# Altium PCB PCB1.PcbDoc (part 2 of 4)
Units mm, origin at the board's own origin, x right, y up, seen from the top; angles counter-clockwise.
Board outline 100.03 x 99.98 mm, 4 copper layers (Top Layer, Layer 2, Layer 3, Bottom Layer), stack 0.603 mm thick; 139 components, 135 nets, 1369 pads, 401 vias.
Unrouted connection lines stored in the file: 1.
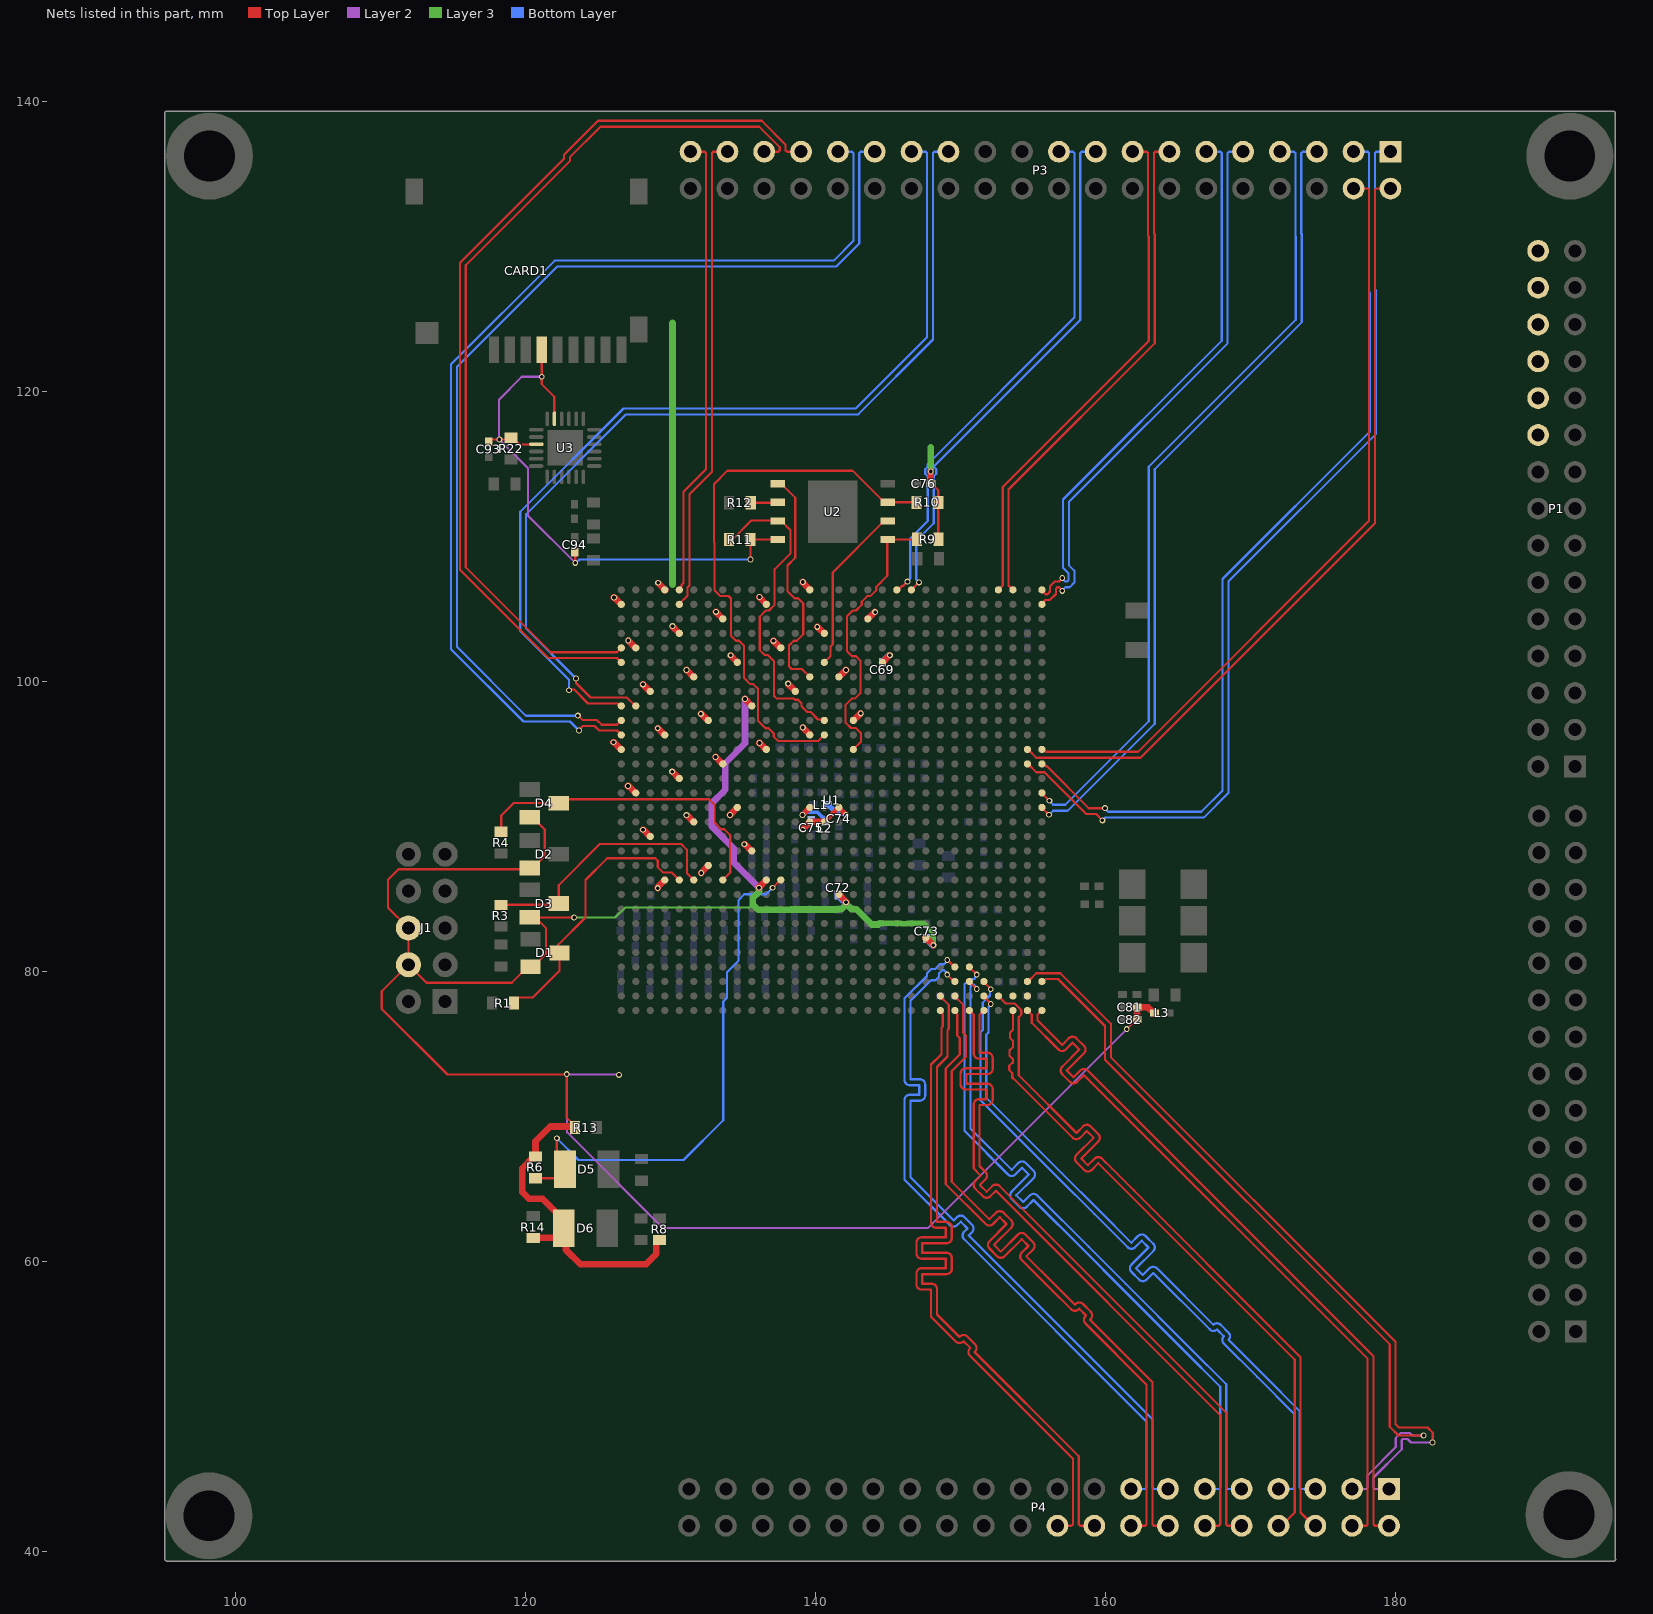
[diagram p4: the nets of this part, all layers, seen from the top]

## Via types
v1: diameter 0.406, hole 0.254, Top Layer to Bottom Layer, 401 vias

## Nets (pads, with @x,y where several pads share a name; then routed paths per layer and width w, separated by ;. In a path a pad name is that pad's centre, name@x,y a point inside that pad or via, vN(x,y) a via of type N, cw(c..) or ccw(c..) an arc to the next point about the centre after c; other vN are vias at no path point) (continued)
+3.3V: C69.2 C72.2 C73.2 C76.2 C81.2 C82.2 C93.2 C94.1 CARD1.4 D1.2 D2.2 D3.2 D4.2 D6.1 J1.4 J1.6 L3.2 P1.25 P1.26 P1.27 R6.2 R8.1 R9.2 R10.2 R11.2 R13.2 R14.2 R22.1 U1.AB6 U1.J25 U1.K22 U1.L10 U1.L29 U1.M26 U1.N23 U1.P20 U1.P30 U1.R27 U1.T9 U1.T24 U1.U21 U1.V28 U1.W25 U2.8 U3.17 U3.21 | length 245.3
  Top Layer w0.152: C93.2@117.626,116.664 117.646,116.684 118.905,116.684 R22.1@119.024,116.803 119.124,116.803 119.595,116.332 120.737,116.332 U3.21@120.758,116.353 ; D3.2@120.31,83.733 120.325,83.718 v1(123.368,83.718) ; D4.2@120.31,90.642 120.5,90.642 121.345,89.798 121.345,87.944 120.538,87.137 D2.2@120.31,87.137 120.31,87.044 111.251,87.044 110.541,86.335 110.541,84.404 J1.6@111.938,83.007 J1.4@111.938,80.467 ; D3.2@120.79,83.629 121.437,82.982 121.437,81.216 120.551,80.33 D1.2@120.361,80.33 120.17,80.33 119.063,79.223 113.182,79.223 J1.4@111.938,80.467 ; CARD1.4@121.131,122.872 121.131,120.5 121.996,119.634 121.996,118.115 U3.17@122.008,118.103 ; v1(122.86,72.923) v1@122.86,72.898 ; R13.2@123.354,69.317 123.354,69.417 122.86,69.911 v1@122.86,72.898 ; C94.1@123.419,108.923 123.444,108.898 v1(123.444,108.179) ; v1(135.534,108.407) R11.2@135.534,109.779 137.388,109.779 U2.8@137.399,109.789 ; C76.2@147.972,113.64 148.022,113.64 148.476,113.186 R10.2@148.476,112.344 148.476,109.83 R9.2@148.502,109.804 ; v1@161.57,76.123 162.129,76.683 C82.2@162.179,76.683 ; J1.4@111.938,80.467 110.109,78.638 110.109,77.419 114.63,72.898 v1@122.86,72.898
  Top Layer w0.457: R14.2@120.548,61.632 122.134,61.632 122.394,61.893 122.518,61.893 122.809,61.602 122.809,60.808 123.8,59.817 128.321,59.817 129.039,60.535 129.039,61.359 129.161,61.48 R8.1@129.261,61.48 ; D6.1@122.655,62.306 122.655,62.856 121.173,64.338 120.244,64.338 119.786,64.795 119.786,66.433 120.601,67.247 R6.2@120.701,67.247 120.701,68.301 121.717,69.317 R13.2@123.354,69.317 ; v1(134.163,101.809) 134.163,101.783 134.62,101.326 U1.J25@134.62,101.314 ; v1(135.153,98.786) 135.62,98.319 U1.K22@135.62,98.314 ; v1(136.119,85.776) 136.119,85.801 136.62,86.302 U1.L10@136.62,86.314 ; v1(136.144,105.816) 136.144,105.802 136.62,105.326 U1.L29@136.62,105.314 ; v1(137.109,102.799) 137.123,102.799 137.608,102.314 U1.M26@137.62,102.314 ; v1(138.125,99.847) 138.125,99.82 138.62,99.326 U1.N23@138.62,99.314 ; v1(139.141,96.825) 139.141,96.804 139.62,96.326 U1.P20@139.62,96.314 ; v1(139.141,106.858) 139.141,106.804 139.62,106.326 U1.P30@139.62,106.314 ; v1(140.132,103.764) 140.158,103.764 140.609,103.314 U1.R27@140.62,103.314 ; U1.T9@141.62,85.314 141.62,85.302 142.113,84.809 v1(142.113,84.765) ; U1.T24@141.62,100.314 141.632,100.314 142.105,100.787 v1(142.113,100.787) ; U1.U21@142.62,97.314 142.632,97.314 143.113,97.795 v1(143.129,97.795) ; U1.V28@143.62,104.314 143.862,104.568 v1@144.094,104.8 ; U1.W25@144.62,101.314 144.632,101.314 145.121,101.803 v1(145.136,101.803) ; U1.AB6@147.62,82.314 147.632,82.314 148.127,81.819 v1(148.133,81.819) ; v1(147.955,114.478) 147.955,113.657 C76.2@147.972,113.64 ; C82.2@162.179,76.683 C81.2@162.179,77.546 162.2,77.525 162.946,77.525 163.331,77.14 L3.2@163.381,77.14
  Layer 2 w0.152: v1(121.133,121.006) 119.761,121.006 118.186,119.431 118.186,116.713 v1(118.212,116.688) 120.193,114.706 120.193,111.43 v1(123.444,108.179) ; v1(122.86,72.923) v1@122.885,72.898 ; v1(126.467,72.873) 126.441,72.898 v1@122.885,72.898 ; v1(161.468,76.022) 147.752,62.306 129.489,62.306 122.885,68.91 v1@122.885,72.898
  Layer 2 w0.457: v1(135.153,98.786) 135.153,95.733 133.782,94.361 133.782,92.532 132.867,91.618 132.867,89.992 134.366,88.494 134.366,87.528 v1(136.119,85.776)
  Layer 3 w0.152: v1(123.368,83.718) 126.187,83.718 126.873,84.404 135.476,84.404 135.687,84.615
  Layer 3 w0.381: 144.438,83.333 145.887,83.333 145.921,83.299 146.331,83.299 146.365,83.333 147.451,83.333 148.133,82.652 v1(148.133,81.819)
  Layer 3 w0.457: v1(136.119,85.776) 136.119,85.489 135.687,85.057 135.687,84.615 136.05,84.252 138.307,84.252 138.332,84.277 141.461,84.277 141.487,84.303 141.821,84.303 142.156,84.637 142.49,84.303 142.824,84.303 143.891,83.236 144.341,83.236 144.438,83.333 ; v1(147.955,114.478) 147.955,116.154
  Bottom Layer w0.152: v1(123.444,108.179) 123.513,108.179 123.741,108.407 v1(135.534,108.407)
  Bottom Layer w0.457: C72.2@141.58,85.276 141.58,85.226 141.914,84.891 141.992,84.891 v1@142.115,84.768 ; C69.2@144.628,101.313 144.628,101.363 145.068,101.803 v1(145.136,101.803) ; C73.2@147.676,82.279 147.676,82.229 148.085,81.819 v1(148.133,81.819)
  other v1: 144.12,104.775
A21_N: P3.29 U1.A21 | length 71.6
  Top Layer w0.152: v1(123.622,97.638) 123.66,97.638 123.965,97.333 124.947,97.333 125.263,97.017 126.323,97.017 U1.A21@126.62,97.314
  Bottom Layer w0.152: v1(123.622,97.638) 120.04,97.638 115.291,102.387 115.291,121.701 122.198,128.608 141.435,128.608 143.027,130.2 143.027,136.436 143.117,136.525 P3.29@144.094,136.525
A21_P: P3.31 U1.A20 | length 72.5
  Top Layer w0.152: v1(123.698,96.622) 123.698,96.66 123.965,96.926 124.779,96.926 125.095,96.611 126.323,96.611 U1.A20@126.62,96.314
  Bottom Layer w0.152: v1(123.698,96.622) 123.088,97.231 119.872,97.231 114.884,102.219 114.884,121.869 122.03,129.015 141.267,129.015 142.621,130.369 142.621,136.436 142.532,136.525 P3.31@141.554,136.525
A22_N: P3.27 U1.A22 | length 64.6
  Top Layer w0.152: v1(123.012,99.39) 123.061,99.439 123.214,99.439 123.228,99.453 123.355,99.453 124.328,98.48 126.36,98.48 126.526,98.314 U1.A22@126.62,98.314
  Bottom Layer w0.152: v1(123.012,99.39) 123.012,100.111 119.651,103.472 119.651,111.697 126.775,118.821 142.783,118.821 147.701,123.739 147.701,136.436 147.612,136.525 P3.27@146.634,136.525
A22_P: P3.25 U1.B22 | length 64.9
  Top Layer w0.152: v1(123.495,100.203) 123.49,100.198 123.49,99.892 124.496,98.886 127.005,98.886 127.577,98.314 U1.B22@127.62,98.314
  Bottom Layer w0.152: v1(123.495,100.203) 120.058,103.64 120.058,111.529 126.944,118.415 142.951,118.415 148.107,123.571 148.107,136.436 148.197,136.525 P3.25@149.174,136.525
A26_N: P3.35 U1.A26 | length 61.8
  Top Layer w0.152: U1.A26@126.62,102.314 126.323,102.017 121.757,102.017 115.9,107.874 115.9,128.702 123.074,135.875 123.074,136.141 125.184,138.252 136.131,138.252 137.541,136.842 137.541,136.614 137.452,136.525 P3.35@136.474,136.525
A26_P: P3.33 U1.A25 | length 63.8
  Top Layer w0.152: U1.A25@126.62,101.314 126.323,101.611 121.588,101.611 115.494,107.705 115.494,128.87 122.667,136.043 122.667,136.31 125.016,138.659 136.299,138.659 137.947,137.01 137.947,136.614 138.037,136.525 P3.33@139.014,136.525
AA30_N: P3.17 U1.AA30 | length 36.4
  Top Layer w0.152: U1.AA30@146.62,106.314 146.624,106.314 v1(147.142,106.832)
  Bottom Layer w0.152: v1(147.142,106.832) 147.142,106.858 146.952,107.049 146.952,109.694 148.158,110.9 148.158,114.142 148.336,114.32 148.336,114.636 148.158,114.813 158.267,124.923 158.267,136.436 158.357,136.525 P3.17@159.334,136.525
AA30_P: P3.19 U1.Y30 | length 36.5
  Top Layer w0.152: U1.Y30@145.62,106.314 145.714,106.314 145.978,106.578 146.049,106.578 v1(146.355,106.883)
  Bottom Layer w0.152: v1(146.355,106.883) 146.355,106.909 146.545,107.099 146.545,109.862 147.752,111.068 147.752,114.142 147.574,114.32 147.574,114.636 147.752,114.813 147.752,114.982 157.861,125.091 157.861,136.436 157.772,136.525 P3.19@156.794,136.525
AC1_N: P4.20 U1.AC1 | length 48.8
  Top Layer w0.152: U1.AC1@148.62,77.314 148.62,77.22 148.786,77.054 148.786,76.21 148.7,76.124 148.7,74.303 147.98,73.584 147.98,62.695 ccw(c148.344,62.695) 148.344,62.332 148.996,62.332 148.996,61.671 147.328,61.671 ccw(c147.328,61.308) 146.964,61.308 146.964,60.561 ccw(c147.328,60.561) 147.328,60.198 148.996,60.198 148.996,59.538 147.328,59.538 ccw(c147.328,59.174) 146.964,59.174 146.964,58.428 ccw(c147.328,58.428) 147.328,58.064 147.98,58.064 147.98,56.185 149.68,54.486 ccw(c149.936,54.743) 150.193,54.486 150.222,54.514 150.689,54.047 150.66,54.019 ccw(c150.917,53.762) 150.66,53.505 157.759,46.406 157.759,41.872 157.67,41.783 P4.20@156.693,41.783
AC1_P: P4.18 U1.AC2 | length 50
  Top Layer w0.152: U1.AC2@148.62,78.314 148.62,78.271 149.192,77.699 149.192,76.042 149.106,75.955 149.106,74.135 148.387,73.415 148.387,62.738 149.04,62.738 cw(c149.04,62.375) 149.403,62.375 149.403,61.628 cw(c149.04,61.628) 149.04,61.265 147.371,61.265 147.371,60.604 149.04,60.604 cw(c149.04,60.241) 149.403,60.241 149.403,59.494 cw(c149.04,59.494) 149.04,59.131 147.371,59.131 147.371,58.471 148.024,58.471 cw(c148.024,58.108) 148.387,58.108 148.387,56.353 149.936,54.804 149.965,54.832 cw(c150.222,54.575) 150.479,54.832 151.007,54.304 cw(c150.75,54.047) 151.113,54.047 cw(c150.75,54.047) 151.007,53.791 150.978,53.762 158.166,46.574 158.166,41.872 158.255,41.783 P4.18@159.233,41.783
AD1_N: P4.16 U1.AD1 | length 49
  Top Layer w0.152: U1.AD1@149.62,77.314 149.62,77.22 149.786,77.054 149.786,75.588 149.962,75.413 149.962,74.27 148.996,73.304 148.996,65.338 151.742,62.593 ccw(c151.998,62.85) 152.255,62.593 152.717,63.055 153.184,62.588 152.004,61.408 ccw(c152.261,61.151) 152.004,60.894 152.532,60.366 ccw(c152.789,60.623) 153.046,60.366 154.226,61.546 154.693,61.079 154.231,60.617 ccw(c154.488,60.361) 154.231,60.104 156.227,58.107 ; 156.134,58.217 157.642,56.708 ccw(c157.899,56.965) 158.156,56.708 158.198,56.75 158.665,56.283 158.623,56.241 ccw(c158.88,55.984) 158.623,55.728 162.839,51.511 162.839,41.872 162.75,41.783 P4.16@161.773,41.783
AD1_P: P4.14 U1.AD2 | length 50
  Top Layer w0.152: U1.AD2@149.62,78.314 149.62,78.271 150.192,77.699 150.192,77.054 150.192,75.757 150.368,75.581 150.368,74.101 149.403,73.136 149.403,65.507 151.998,62.911 152.46,63.372 cw(c152.717,63.116) 152.974,63.372 ; 152.974,63.372 153.502,62.844 cw(c153.245,62.588) 153.608,62.588 cw(c153.245,62.588) 153.502,62.331 152.322,61.151 152.789,60.684 153.969,61.864 cw(c154.226,61.607) 154.482,61.864 155.01,61.336 cw(c154.754,61.079) 155.117,61.079 cw(c154.754,61.079) 155.01,60.822 154.549,60.361 156.464,58.445 ; 156.472,58.453 157.899,57.026 157.941,57.068 cw(c158.198,56.811) 158.455,57.068 ; 158.455,57.068 158.983,56.54 cw(c158.726,56.283) 159.089,56.283 cw(c158.726,56.283) 158.983,56.026 158.941,55.984 163.246,51.68 163.246,41.872 163.335,41.783 P4.14@164.313,41.783
AD3_N: P4.13 U1.AD3 | length 48.8
  Top Layer w0.152: v1(149.098,79.781) 149.566,79.314 U1.AD3@149.62,79.314
  Bottom Layer w0.152: v1(149.098,79.781) 149.098,79.85 148.958,79.99 148.958,79.997 148.869,80.086 148.742,80.086 148.531,79.875 148.531,79.641 148.291,79.4 147.98,79.4 146.558,77.978 146.558,72.568 147.211,72.568 cw(c147.211,72.205) 147.574,72.205 147.574,71.458 cw(c147.211,71.458) 147.211,71.095 146.558,71.095 146.558,65.811 149.535,62.835 149.763,63.063 cw(c150.02,62.806) 150.277,63.063 150.805,62.535 cw(c150.548,62.278) 150.911,62.278 cw(c150.548,62.278) 150.805,62.021 150.576,61.793 163.246,49.124 163.246,44.412 163.335,44.323 P4.13@164.313,44.323
AD3_P: P4.15 U1.AD4 | length 49.5
  Top Layer w0.152: v1(149.098,80.797) 149.117,80.797 149.601,80.314 U1.AD4@149.62,80.314
  Bottom Layer w0.152: v1(149.098,80.797) 149.098,80.729 148.958,80.589 148.958,80.582 148.869,80.493 148.574,80.493 148.244,80.162 147.975,80.162 147.693,79.88 147.693,79.688 146.152,78.146 146.152,72.525 ccw(c146.515,72.525) 146.515,72.161 147.168,72.161 147.168,71.501 146.515,71.501 ccw(c146.515,71.138) 146.152,71.138 146.152,65.643 149.278,62.517 ccw(c149.535,62.774) 149.792,62.517 150.02,62.745 150.487,62.278 150.258,62.05 ccw(c150.515,61.793) 150.258,61.536 162.839,48.955 162.839,44.412 162.75,44.323 P4.15@161.773,44.323
AE3_N: P4.9 U1.AE3 | length 48
  Top Layer w0.152: U1.AE3@150.62,79.314 150.62,79.307 151.13,78.797 v1(151.13,78.791)
  Bottom Layer w0.152: v1(151.13,78.791) 151.13,78.86 151.027,78.963 151.027,78.994 150.938,79.083 150.811,79.083 150.698,78.97 150.698,69.164 153.535,66.327 153.997,66.789 cw(c154.254,66.532) 154.51,66.789 ; 154.511,66.789 155.038,66.261 cw(c154.782,66.004) 155.145,66.004 cw(c154.782,66.004) 155.038,65.747 153.858,64.567 154.325,64.1 154.787,64.562 cw(c155.044,64.305) 155.301,64.562 158.844,61.019 161.394,58.468 165.786,54.077 168.326,51.537 168.326,44.412 168.415,44.323 P4.9@169.393,44.323
AE3_P: P4.11 U1.AE4 | length 48.6
  Top Layer w0.152: U1.AE4@150.62,80.314 150.62,80.302 151.13,79.793 v1(151.13,79.781)
  Bottom Layer w0.152: v1(151.13,79.781) 151.13,79.713 151.027,79.61 151.027,79.579 150.938,79.489 150.643,79.489 150.292,79.138 150.292,68.996 153.278,66.009 ccw(c153.535,66.266) 153.792,66.009 154.254,66.471 154.721,66.004 153.541,64.824 ccw(c153.797,64.567) 153.541,64.31 154.069,63.782 ccw(c154.325,64.039) 154.582,63.782 155.044,64.244 158.587,60.701 161.076,58.211 165.379,53.908 167.919,51.368 167.919,44.412 167.83,44.323 P4.11@166.853,44.323
AF1_N: P4.10 U1.AF1 | length 50
  Top Layer w0.152: U1.AF1@151.62,77.314 151.323,77.017 151.323,74.397 151.863,74.397 cw(c151.863,74.033) 152.226,74.033 152.226,73.287 cw(c151.863,73.287) 151.863,72.923 150.42,72.923 150.42,72.263 151.863,72.263 cw(c151.863,71.9) 152.226,71.9 152.226,71.153 cw(c151.863,71.153) 151.863,70.79 151.323,70.79 151.323,66.583 151.725,66.181 cw(c151.469,65.924) 151.832,65.924 cw(c151.469,65.924) 151.725,65.667 151.344,65.286 151.811,64.819 152.192,65.2 cw(c152.449,64.944) 152.706,65.2 168.326,49.581 168.326,41.872 168.415,41.783 P4.10@169.393,41.783
AF1_P: P4.12 U1.AE1 | length 50
  Top Layer w0.152: U1.AE1@150.62,77.314 150.917,77.017 150.917,74.353 ccw(c151.28,74.353) 151.28,73.99 151.82,73.99 151.82,73.33 150.377,73.33 ccw(c150.377,72.967) 150.014,72.967 150.014,72.22 ccw(c150.377,72.22) 150.377,71.857 151.82,71.857 151.82,71.196 151.28,71.196 ccw(c151.28,70.833) 150.917,70.833 150.917,66.415 151.408,65.924 151.026,65.543 ccw(c151.283,65.286) 151.026,65.029 151.554,64.501 ccw(c151.811,64.758) 152.068,64.501 152.449,64.883 167.919,49.412 167.919,41.872 167.83,41.783 P4.12@166.853,41.783
AF2_N: P4.5 U1.AF2 | length 48.3
  Top Layer w0.152: U1.AF2@151.62,78.314 151.62,78.273 152.095,77.798 v1(152.095,77.758)
  Bottom Layer w0.152: v1(152.095,77.758) 152.095,77.694 151.943,77.542 151.943,75.794 151.79,75.641 151.79,71.298 156.99,66.099 159.54,63.548 161.79,61.298 162.252,61.76 cw(c162.509,61.503) 162.765,61.76 ; 162.766,61.759 163.293,61.232 cw(c163.037,60.975) 163.4,60.975 cw(c163.037,60.975) 163.293,60.718 162.113,59.538 162.58,59.071 163.042,59.532 cw(c163.299,59.276) 163.556,59.532 167.444,55.644 cw(c167.694,55.38) 167.951,55.637 168.479,55.109 cw(c168.222,54.852) 168.585,54.852 cw(c168.222,54.852) 168.486,54.602 170.866,52.222 173.406,49.682 173.406,44.412 173.495,44.323 P4.5@174.473,44.323
AF2_P: P4.7 U1.AF3 | length 49.4
  Top Layer w0.152: U1.AF3@151.62,79.314 151.62,79.281 152.095,78.806 v1(152.095,78.774)
  Bottom Layer w0.152: v1(152.095,78.774) 152.047,78.725 152.047,78.352 151.536,77.842 151.536,75.962 151.384,75.81 151.384,71.129 156.733,65.781 159.222,63.291 161.533,60.98 ccw(c161.79,61.237) 162.047,60.98 162.509,61.442 162.976,60.975 161.796,59.795 ccw(c162.052,59.538) 161.796,59.281 162.324,58.753 ccw(c162.58,59.01) 162.837,58.753 163.299,59.215 167.187,55.326 ccw(c167.444,55.583) 167.694,55.319 168.161,54.852 ccw(c168.425,54.602) 168.168,54.345 170.459,52.054 172.999,49.514 172.999,44.412 172.91,44.323 P4.7@171.933,44.323
AGND: C74.1 C75.1 L1.2 U1.P14 U1.R14 U1.T15 | length 6.5
  Top Layer w0.356: U1.R14@140.62,90.314 U1.T15@141.62,91.314 ; U1.T15@141.659,91.314 U1.T15@141.62,91.314 ; v1(142.113,90.78) 142.113,90.793 141.62,91.286 U1.T15@141.62,91.314
  Top Layer w0.457: v1(139.141,89.764) 139.141,89.823 139.62,90.302 U1.P14@139.62,90.314 U1.R14@140.62,90.314
  Bottom Layer w0.356: v1(139.141,89.764) 139.141,89.774 139.725,90.358 C75.1@139.725,90.408 C75.1@139.76,90.373 ; L1.2@140.86,91.491 140.91,91.491 141.261,91.14 141.533,91.14 141.605,91.068 C74.1@141.605,91.018 141.605,90.968 141.677,90.895 141.983,90.895 142.099,90.78 v1(142.113,90.78)
AH1_N: P4.8 U1.AH1 | length 48.4
  Top Layer w0.152: 153.592,72.64 153.581,72.652 153.581,72.987 153.365,73.203 153.365,73.508 153.568,73.711 153.62,73.711 153.62,73.964 153.391,74.193 153.391,74.549 153.62,74.779 153.62,75.234 153.416,75.438 153.416,75.768 153.62,75.972 U1.AH1@153.62,77.314 ; 153.62,72.668 157.744,68.545 ccw(c158.001,68.801) 158.258,68.545 158.719,69.006 159.186,68.539 158.006,67.359 ccw(c158.263,67.102) 158.006,66.846 ; 158.006,66.845 158.534,66.317 ccw(c158.791,66.574) 159.048,66.317 159.51,66.779 162.916,63.373 173.05,53.238 173.05,42.697 172.136,41.783 P4.8@171.933,41.783
AH1_P: P4.6 U1.AG2 | length 51.8
  Top Layer w0.152: U1.AG2@152.62,78.314 153.134,77.8 153.739,77.8 154.192,77.347 154.192,77.027 154,76.835 154,76.709 154.027,76.682 154.027,72.837 158.001,68.862 158.462,69.324 cw(c158.719,69.067) 158.976,69.324 159.504,68.796 cw(c159.247,68.539) 159.611,68.539 cw(c159.247,68.539) 159.504,68.282 158.324,67.102 158.791,66.635 159.253,67.097 cw(c159.51,66.84) 159.766,67.097 160.472,66.391 ; 161.95,64.913 160.472,66.391 ; P4.6@174.473,41.783 174.371,41.783 173.457,42.697 173.457,53.407 160.472,66.391
AH_30_N: P3.13 U1.AH30 | length 35.5
  Top Layer w0.152: U1.AH30@153.62,106.314 153.323,106.611 153.323,113.233 163.398,123.308 163.398,130.848 163.347,130.899 163.347,136.436 163.437,136.525 P3.13@164.414,136.525
AH_30_P: P3.15 U1.AG30 | length 35.5
  Top Layer w0.152: U1.AG30@152.62,106.314 152.917,106.611 152.917,113.402 162.992,123.476 162.992,130.68 162.941,130.731 162.941,136.436 162.852,136.525 P3.15@161.874,136.525
AJ2_N: U1.AJ2
AJ2_P: U1.AH2
AK1_N: P4.4 U1.AJ1 | length 49.9
  Top Layer w0.152: U1.AJ1@154.62,77.314 154.917,77.017 154.917,76.461 156.758,74.62 ccw(c157.015,74.877) 157.272,74.62 157.733,75.081 158.2,74.615 157.02,73.435 ccw(c157.277,73.178) 157.02,72.921 157.548,72.393 ccw(c157.805,72.65) 158.062,72.393 158.524,72.854 178.079,53.299 178.079,41.872 177.99,41.783 P4.4@177.013,41.783
AK1_P: P4.2 U1.AK1 | length 49.9
  Top Layer w0.152: U1.AK1@155.62,77.314 155.323,77.017 155.323,76.629 157.015,74.938 157.477,75.399 cw(c157.733,75.143) 157.99,75.399 ; 157.99,75.399 158.518,74.871 cw(c158.261,74.615) 158.625,74.615 cw(c158.261,74.615) 158.518,74.358 157.338,73.178 157.805,72.711 158.267,73.172 cw(c158.524,72.915) 158.781,73.172 178.486,53.467 178.486,41.872 178.575,41.783 P4.2@179.553,41.783
AK3_N: P4.3 U1.AK3 | length 51.6
  Top Layer w0.152: U1.AK3@155.62,79.314 155.714,79.314 155.88,79.48 156.724,79.48 159.969,76.235 159.969,73.923 179.603,54.289 179.603,48.616 180.213,48.006 v1(181.94,48.006)
  Layer 2 w0.152: P4.3@177.013,44.323 177.99,44.323 178.079,44.412 178.079,45.276 180.022,47.219 180.022,47.844 180.35,48.171 181.004,48.171 181.169,48.006 v1(181.94,48.006)
AK3_P: P4.1 U1.AJ3 | length 54.1
  Top Layer w0.152: U1.AJ3@154.62,79.314 154.663,79.314 155.235,79.886 156.893,79.886 160.376,76.403 160.376,74.092 180.01,54.458 180.01,48.784 180.229,48.565 182.213,48.565 182.575,48.202 v1@182.575,47.523
  Layer 2 w0.152: P4.1@179.553,44.323 178.575,44.323 178.486,44.412 178.486,45.107 180.429,47.05 180.429,47.675 180.518,47.765 180.835,47.765 181.077,47.523 v1(182.55,47.523)
AK15_N: P3.5 U1.AK15 | length 55.3
  Top Layer w0.152: U1.AK15@155.62,91.314 155.62,91.293 v1(156.108,90.805)
  Bottom Layer w0.152: v1@156.108,90.854 v1(156.108,90.805) 156.121,90.805 156.4,91.084 157.394,91.084 163.398,97.088 163.398,114.64 173.533,124.774 173.533,130.84 173.507,130.866 173.507,136.436 173.597,136.525 P3.5@174.574,136.525
AK15_P: P3.7 U1.AK16 | length 54.6
  Top Layer w0.152: U1.AK16@155.62,92.314 155.62,92.299 156.134,91.785 v1(156.134,91.77)
  Bottom Layer w0.152: v1(156.134,91.77) 156.134,91.757 156.4,91.491 157.226,91.491 162.992,97.257 162.992,114.808 173.126,124.943 173.126,130.672 173.101,130.697 173.101,136.436 173.012,136.525 P3.7@172.034,136.525
AK18_N: P3.3 U1.AK18 | length 63.8
  Top Layer w0.152: U1.AK18@155.62,94.314 155.714,94.314 155.88,94.148 155.966,94.148 158.852,91.262 v1(159.969,91.262)
  Layer 2 w0.152: v1@159.969,91.237 v1(159.969,91.262)
  Bottom Layer w0.152: v1(159.969,91.262) 159.969,91.237 160.185,91.021 163.312,91.021 163.316,91.016 166.616,91.016 168.072,92.472 168.072,107.061 178.232,117.221 178.232,126.798 178.181,126.849 178.181,136.436 178.092,136.525 P3.3@177.114,136.525
AK18_P: P3.1 U1.AJ18 | length 65.7
  Top Layer w0.152: U1.AJ18@154.62,94.314 154.663,94.314 155.235,93.742 155.797,93.742 158.683,90.856 159.36,90.856 v1(159.791,90.424)
  Layer 2 w0.152: v1(159.791,90.424) v1@159.817,90.424
  Bottom Layer w0.152: v1(159.791,90.424) 159.817,90.424 160.008,90.615 163.143,90.615 163.148,90.61 166.784,90.61 168.478,92.304 168.478,106.893 178.638,117.053 178.638,126.967 178.587,127.017 178.587,136.436 178.677,136.525 P3.1@179.654,136.525
AK19_N: P3.4 U1.AK19 | length 53.2
  Top Layer w0.152: U1.AK19@155.62,95.314 155.714,95.314 155.88,95.148 162.255,95.148 178.181,111.074 178.181,133.896 178.092,133.985 P3.4@177.114,133.985
AK19_P: P3.2 U1.AJ19 | length 55
  Top Layer w0.152: U1.AJ19@154.62,95.314 154.663,95.314 155.235,94.742 162.423,94.742 178.587,110.906 178.587,133.896 178.677,133.985 P3.2@179.654,133.985
AK30_N: P3.11 U1.AK30 | length 38.1
  Top Layer w0.152: U1.AK30@155.62,106.314 155.62,106.271 155.874,106.017 156,106.017 156.185,106.202 156.185,106.569 156.512,106.896 156.807,106.896 157.023,107.112 v1(157.023,107.137)
  Bottom Layer w0.152: v1(157.023,107.137) 157.023,107.112 157.239,106.896 157.365,106.896 157.455,106.985 157.455,107.456 157.074,107.837 157.074,112.547 168.021,123.495 168.021,136.436 167.932,136.525 P3.11@166.954,136.525
AK30_P: P3.9 U1.AK29 | length 38.7
  Top Layer w0.152: U1.AK29@155.62,105.314 155.62,105.357 155.874,105.611 156.169,105.611 156.591,106.033 156.591,106.4 156.68,106.489 156.807,106.489 157.023,106.273 v1(157.023,106.248)
  Bottom Layer w0.152: v1(157.023,106.248) 157.023,106.273 157.239,106.489 157.534,106.489 157.861,106.817 157.861,107.625 157.48,108.006 157.48,112.379 168.427,123.326 168.427,136.436 168.517,136.525 P3.9@169.494,136.525
AVCC: L2.2 U1.P15 | length 2.7
  Top Layer w0.406: v1(139.112,90.785) 139.62,91.293 U1.P15@139.62,91.314
  Bottom Layer w0.254: 139.328,90.987 140.143,90.987 L2.2@140.568,90.563
  Bottom Layer w0.356: v1(139.112,90.785) 139.125,90.785 139.328,90.987 ; L2.2@140.568,90.563 140.568,90.445 L2.2@140.64,90.373
DIMM_VCCO: P1.28 P1.29 P1.30 U1.A19 U1.A29 U1.B16 U1.B26 U1.C13 U1.C23 U1.D10 U1.D20 U1.D30 U1.E17 U1.E27 U1.F14 U1.F24 U1.G11 U1.G21 U1.H18 U1.H28 U1.J15 U1.K12 U1.L19 | length 32.3
  Top Layer w0.457: v1(126.086,95.809) 126.114,95.809 126.608,95.314 U1.A19@126.62,95.314 ; v1(126.111,105.791) 126.143,105.791 U1.A29@126.62,105.314 ; v1(127.076,92.786) 127.136,92.786 127.608,92.314 U1.B16@127.62,92.314 ; v1(127.102,102.819) 127.103,102.819 127.608,102.314 U1.B26@127.62,102.314 ; v1(128.118,89.777) 128.145,89.777 128.608,89.314 U1.C13@128.62,89.314 ; v1(128.118,99.797) 128.126,99.797 128.608,99.314 U1.C23@128.62,99.314 ; v1(129.134,85.75) 129.134,85.816 129.62,86.302 U1.D10@129.62,86.314 ; v1(129.134,96.774) 129.148,96.774 129.608,96.314 U1.D20@129.62,96.314 ; v1@129.166,106.782 129.627,106.321 U1.D30@129.643,106.305 ; v1(130.124,93.777) 130.146,93.777 130.608,93.314 U1.E17@130.62,93.314 ; v1(130.15,103.81) 130.15,103.796 130.62,103.326 U1.E27@130.62,103.314 ; v1(131.115,90.78) 131.143,90.78 131.608,90.314 U1.F14@131.62,90.314 ; v1(131.115,100.787) 131.135,100.787 131.608,100.314 U1.F24@131.62,100.314 ; v1(132.105,97.765) 132.158,97.765 132.608,97.314 U1.G21@132.62,97.314 ; v1(132.131,86.792) 132.131,86.813 132.62,87.302 U1.G11@132.62,87.314 ; v1(133.121,94.793) 133.13,94.793 133.608,94.314 U1.H18@133.62,94.314 ; v1(133.147,104.8) 133.147,104.799 133.62,104.326 U1.H28@133.62,104.314 ; v1(134.112,90.793) 134.112,90.794 134.62,91.302 U1.J15@134.62,91.314 ; v1(135.103,88.773) 135.149,88.773 135.608,88.314 U1.K12@135.62,88.314 ; v1(136.144,95.758) 136.164,95.758 136.608,95.314 U1.L19@136.62,95.314
  Layer 3 w0.457: 130.15,106.68 130.15,124.714 ; P1.29@189.689,127.152 P1.29@189.84,127.152
  other v1: 129.159,106.807
E30_N: P3.39 U1.E30 | length 32
  Top Layer w0.152: U1.E30@130.62,106.314 130.62,106.408 130.786,106.574 130.786,106.66 130.912,106.785 130.912,113.081 132.461,114.63 132.461,136.436 132.372,136.525 P3.39@131.394,136.525
E30_P: P3.37 U1.E29 | length 33.2
  Top Layer w0.152: U1.E29@130.62,105.314 130.62,105.357 131.192,105.929 131.192,106.491 131.318,106.617 131.318,112.912 132.867,114.462 132.867,136.436 132.957,136.525 P3.37@133.934,136.525
FLASH_CE: R9.1 U1.U19 U2.1 | length 20.2
  Top Layer w0.152: U1.U19@142.62,95.314 143.154,95.848 143.154,96.418 142.786,96.787 142.456,96.787 142.088,97.155 142.088,98.386 142.515,98.814 142.725,98.814 143.104,99.192 143.104,101.436 142.797,101.742 142.53,101.742 142.189,102.083 142.189,104.488 142.587,104.886 142.797,104.886 143.192,105.281 143.192,105.491 143.584,105.883 143.794,105.883 144.192,106.281 144.192,106.515 144.958,107.28 144.958,109.58 144.748,109.789 U2.1@144.999,109.789 146.987,109.789 R9.1@147.002,109.804
FLASH_D0: U1.P24 U2.5 | length 16.3
  Top Layer w0.152: U2.5@137.399,113.629 137.649,113.629 138.608,112.67 138.608,108.534 138.074,108.001 138.074,106.224 138.557,105.742 138.797,105.742 139.167,105.372 139.167,103.256 138.717,102.806 138.507,102.806 138.176,102.475 138.176,101.041 138.354,100.863 139.071,100.863 U1.P24@139.62,100.314
FLASH_D1: U1.R25 U2.2 | length 11.7
  Top Layer w0.152: U1.R25@140.62,101.314 141.048,101.742 141.048,102.415 141.199,102.565 141.199,103.131 141.192,103.137 141.192,107.512 144.75,111.069 U2.2@144.998,111.069
FLASH_D2: R10.1 U1.R20 U2.3 | length 38.9
  Top Layer w0.152: U1.R20@140.62,96.314 140.192,95.886 137.443,95.886 137.135,96.194 137.135,96.404 136.768,96.771 136.558,96.771 136.048,97.281 136.048,99.491 135.725,99.814 135.515,99.814 135.077,100.252 135.077,102.462 134.74,102.799 134.53,102.799 134.188,103.141 134.188,105.715 134.017,105.886 133.443,105.886 133.048,106.281 133.048,109.56 133.02,109.588 133.02,113.614 133.934,114.529 142.569,114.529 144.748,112.349 U2.3@144.998,112.349 146.971,112.349 R10.1@146.976,112.344
FLASH_D3: R11.1 U1.R21 U2.7 | length 22.8
  Top Layer w0.152: R11.1@134.308,110.153 134.034,109.879 R11.1@134.034,109.779 134.264,109.779 135.585,111.1 137.368,111.1 U2.7@137.399,111.069 137.649,111.069 138.278,110.44 138.278,108.814 137.192,107.728 137.192,105.281 136.797,104.886 136.587,104.886 136.169,104.468 136.169,102.16 136.504,101.825 136.714,101.825 137.15,101.389 137.15,98.993 137.312,98.831 138.498,98.831 138.587,98.742 138.797,98.742 139.048,98.491 139.048,98.281 139.443,97.886 139.68,97.886 140.186,97.381 140.554,97.381 U1.R21@140.62,97.314
FPGA_CCLK: R12.2 U2.6 | length 1.9
  Top Layer w0.152: R12.2@135.548,112.319 137.368,112.319 U2.6@137.399,112.349
FPGA_DONE: D5.1 R6.1 U1.M10 | length 37
  Top Layer w0.152: R6.1@120.701,65.747 122.108,65.747 D5.1@122.731,66.37 122.733,66.372 122.174,66.93 v1(122.174,68.504) ; v1(137.058,85.776) 137.596,86.314 U1.M10@137.62,86.314
  Bottom Layer w0.152: v1(122.174,68.504) 123.673,67.005 130.912,67.005 133.655,69.748 133.655,77.933 133.909,78.187 133.909,79.946 134.696,80.733 134.696,84.912 135.104,85.32 136.602,85.32 v1(137.058,85.776)
FPGA_TCK: D1.3 R1.1 U1.E10 | length 18.8
  Top Layer w0.152: R1.1@119.216,77.826 119.216,77.926 119.489,78.199 120.49,78.199 122.352,80.061 D1.3@122.352,81.28 ; D1.3@122.276,81.597 122.276,81.839 124.155,83.718 124.155,86.309 125.654,87.808 128.956,87.808 129.134,87.63 129.134,87.195 129.512,86.817 130.117,86.817 U1.E10@130.62,86.314
FPGA_TDI: D4.3 R4.1 U1.H10 | length 22.4
  Top Layer w0.152: R4.1@118.339,89.638 118.339,90.754 119.202,91.618 122.276,91.618 D4.3@122.301,91.592 122.58,91.872 132.69,91.872 132.69,91.849 133.048,91.491 133.048,90.281 133.514,89.814 133.724,89.814 134.137,89.401 134.137,86.831 U1.H10@133.62,86.314
FPGA_TMS: D3.3 R3.1 U1.F10 | length 17.8
  Top Layer w0.152: R3.1@118.313,84.595 122.213,84.595 D3.3@122.301,84.684 122.301,85.954 125.146,88.798 130.74,88.798 131.14,88.399 131.14,86.794 U1.F10@131.62,86.314